# Altium PCB final_board.PcbDoc (part 1 of 2)
Units mm, origin at the board's own origin, x right, y up, seen from the top; angles counter-clockwise.
Board outline 39.12 x 41.3 mm, 2 copper layers (Top Layer, Bottom Layer); 55 components, 47 nets, 226 pads, 45 vias.
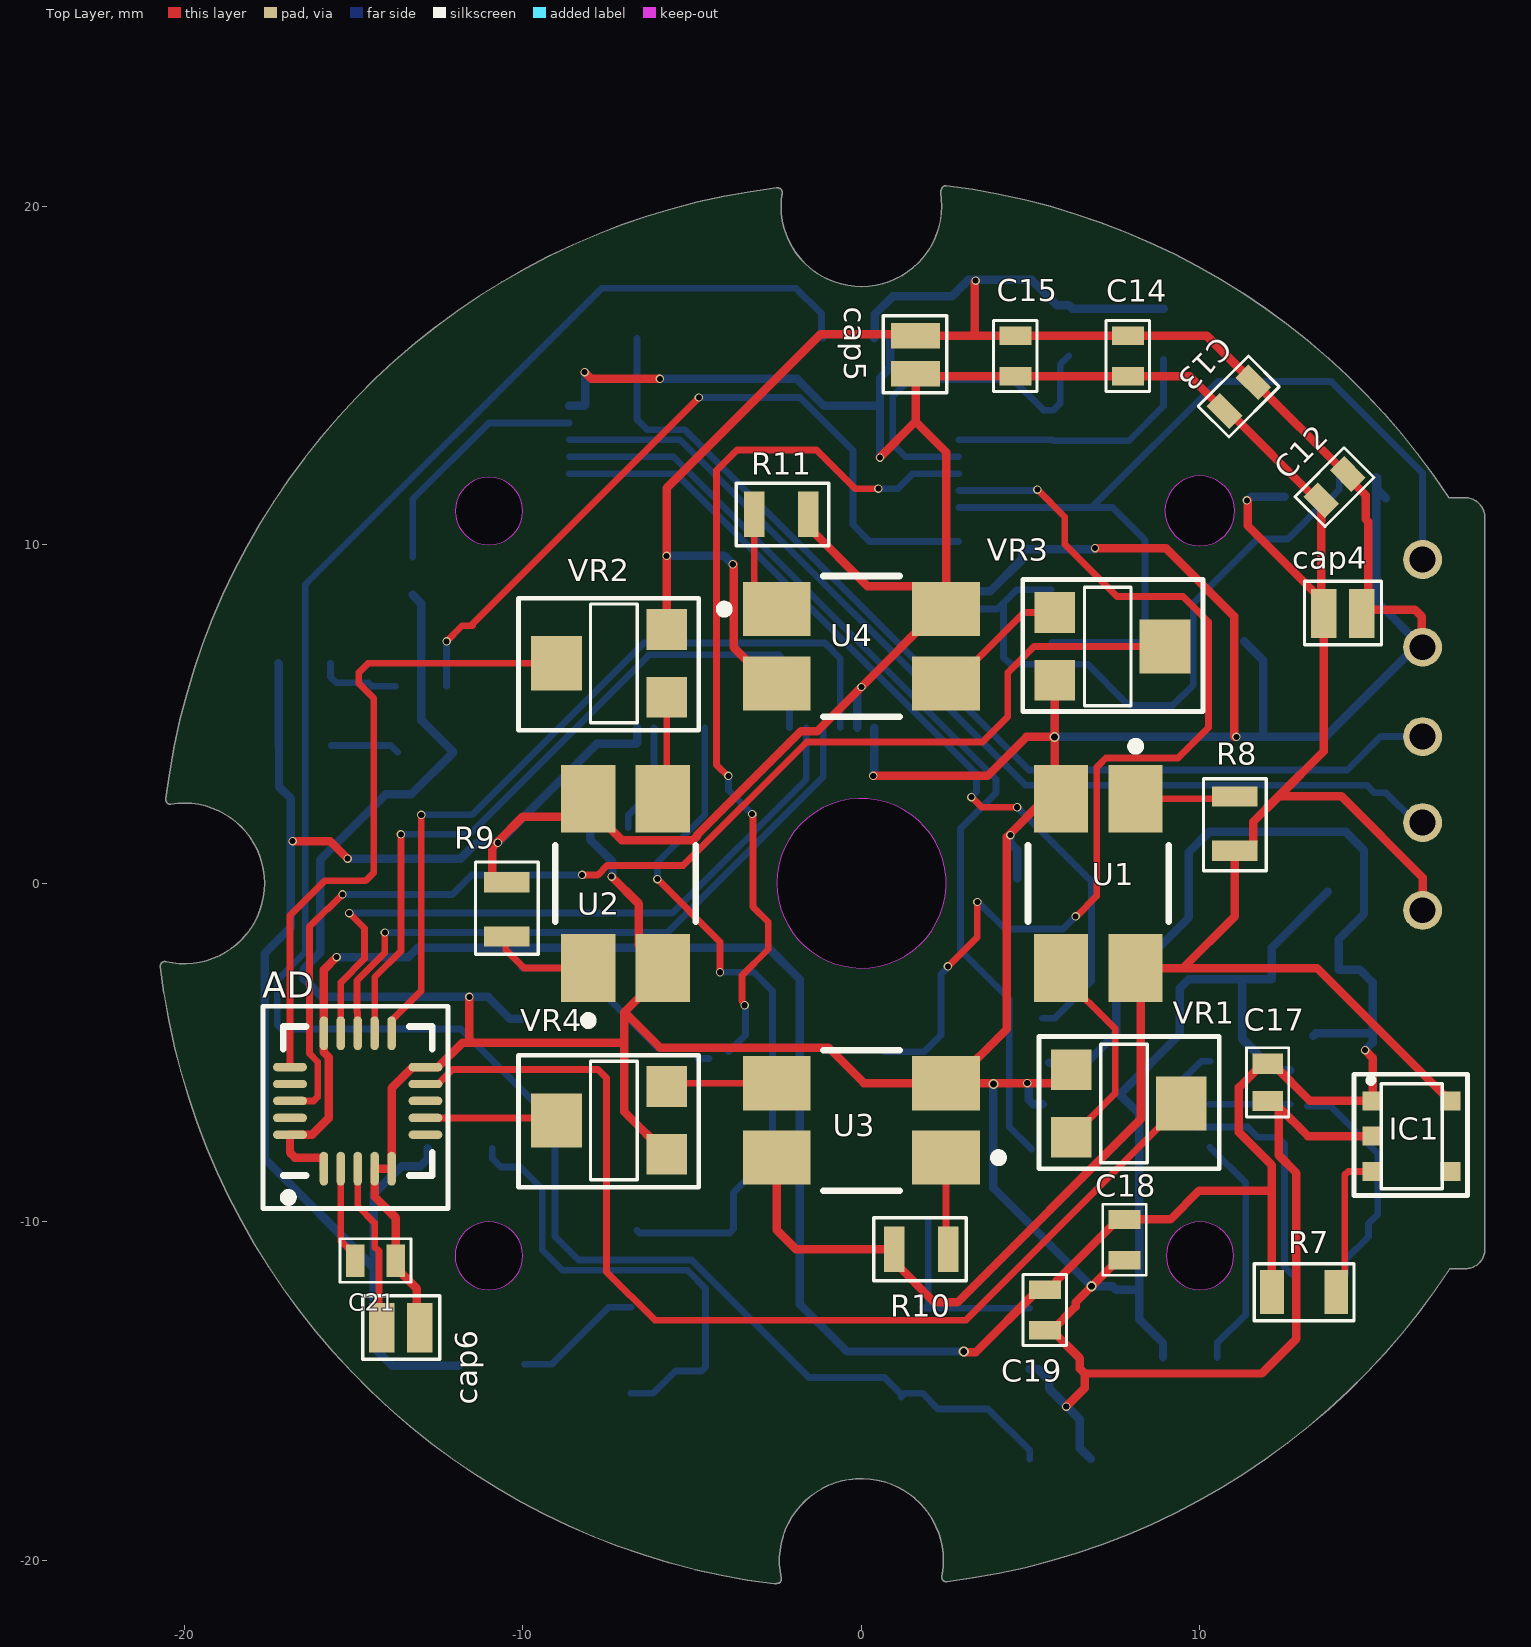
[diagram p0: Top Layer view]
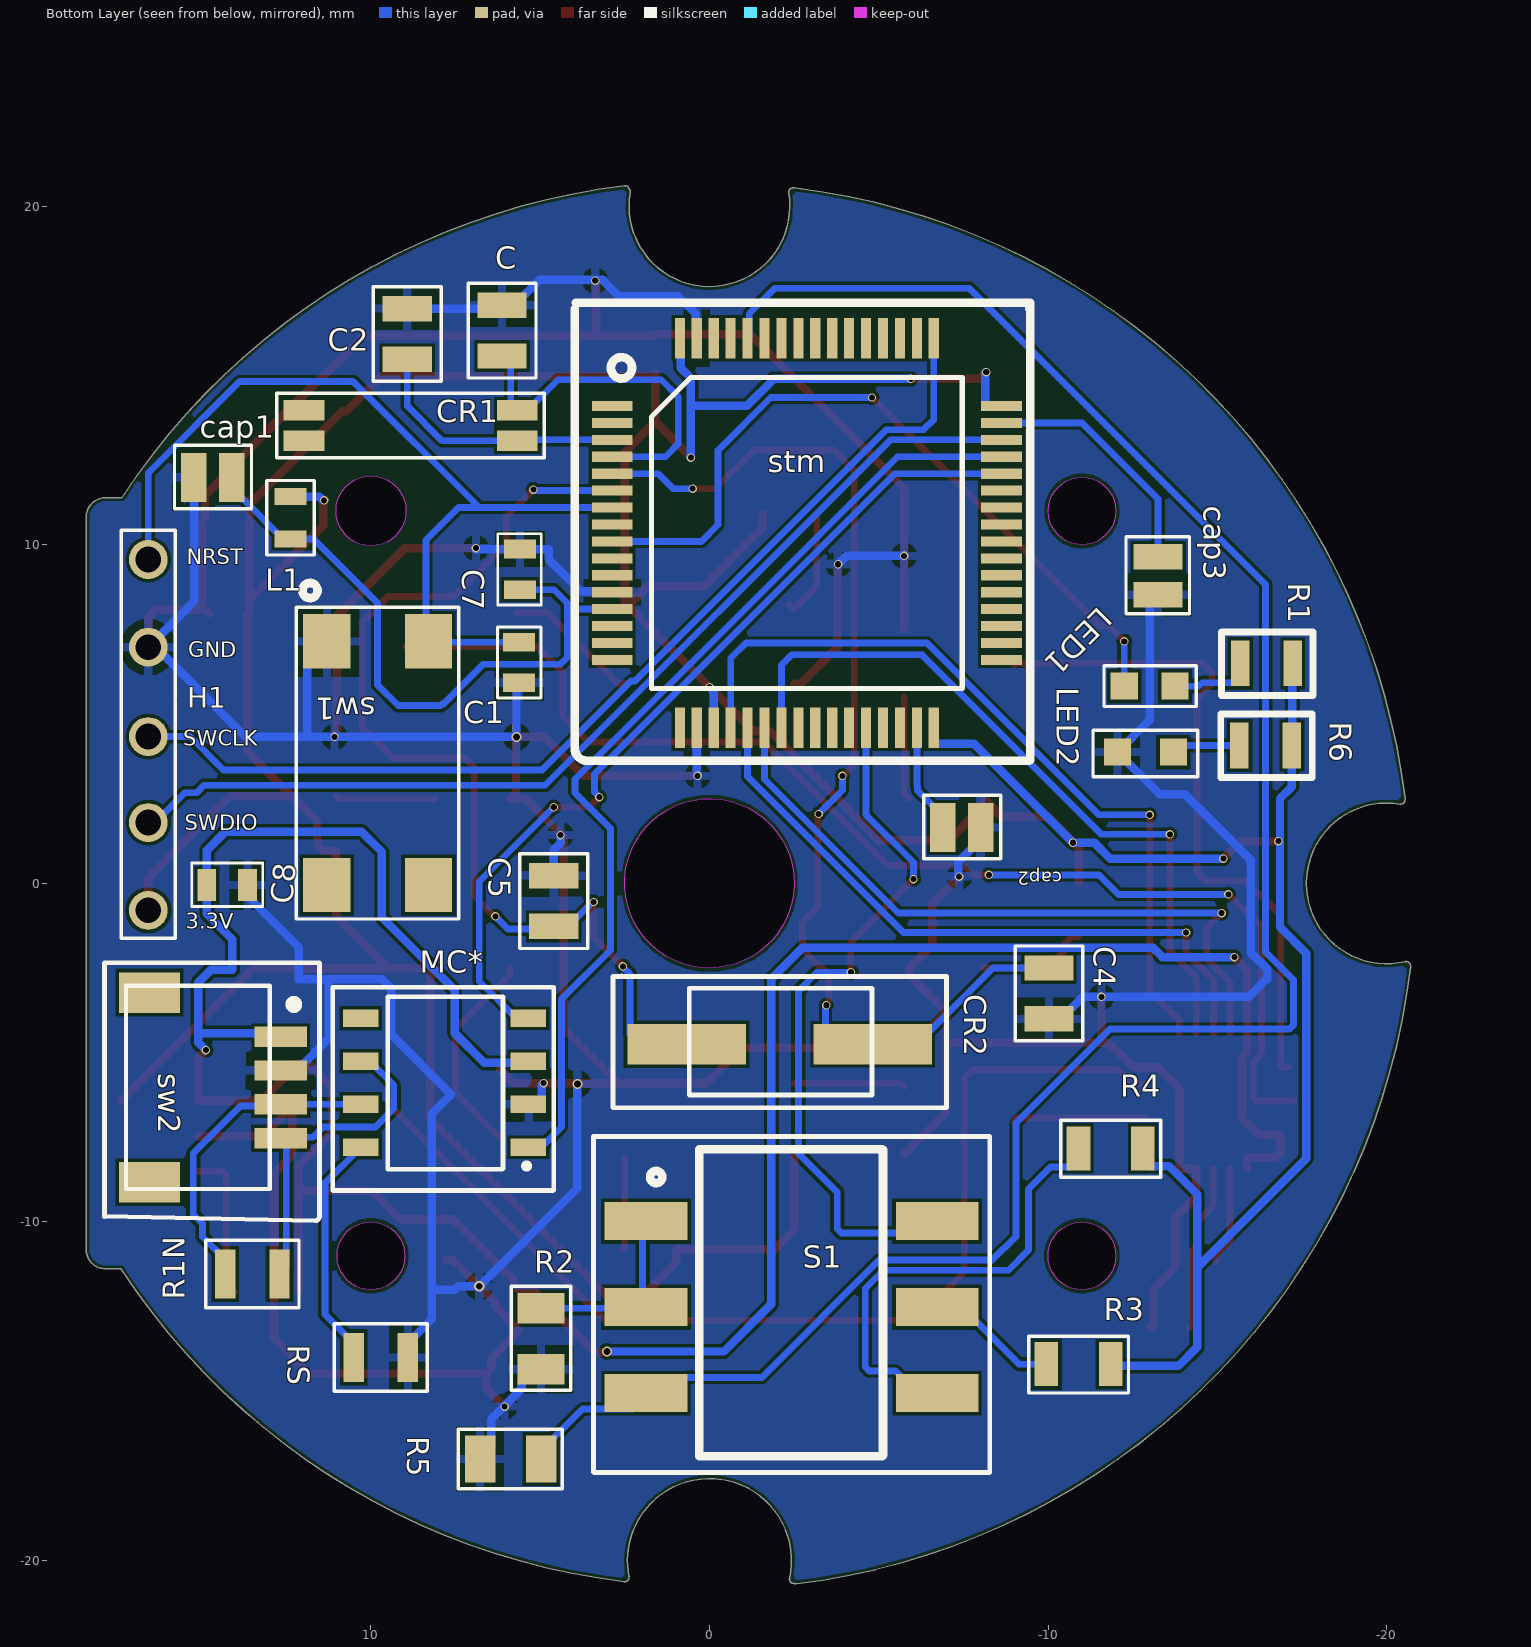
[diagram p1: Bottom Layer view, seen from below]
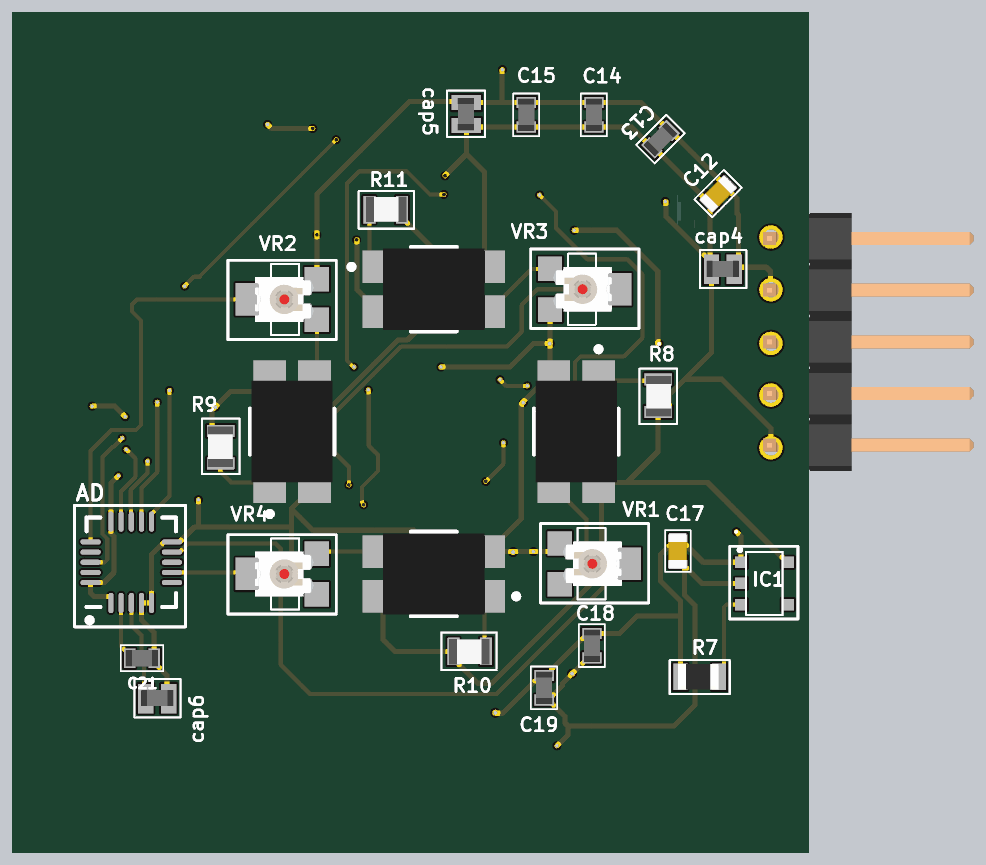
[diagram p2: 3D render of the assembled board from above, using the file's embedded part models]
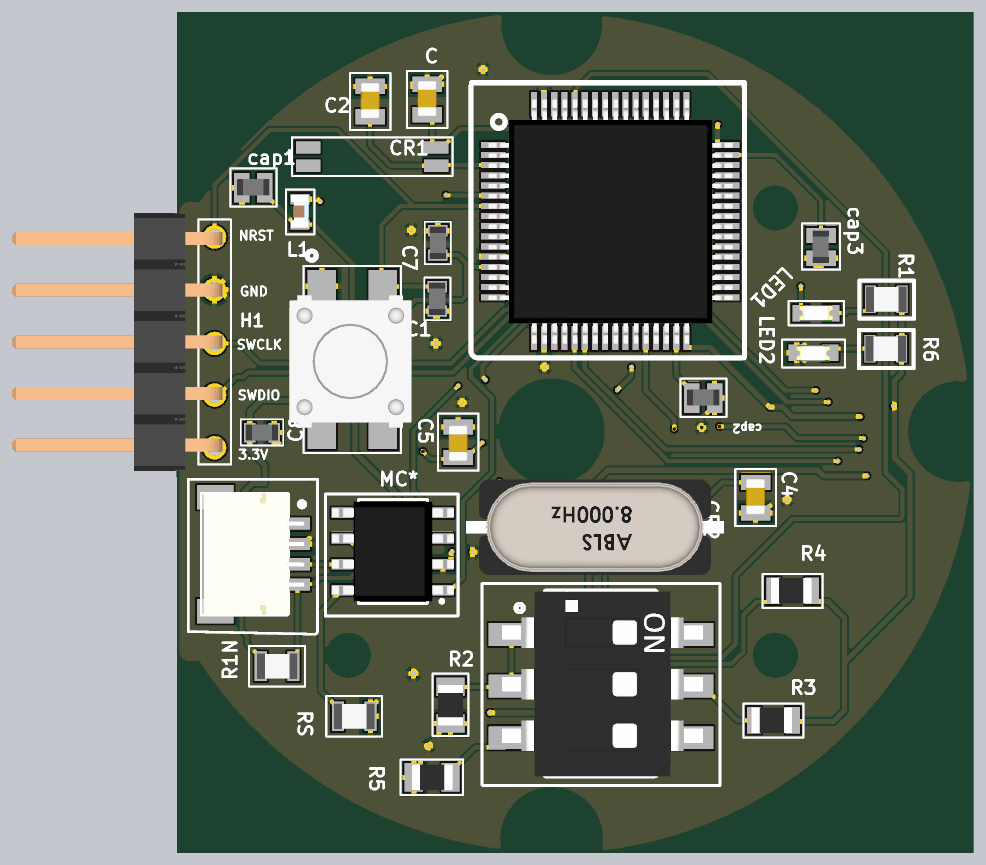
[diagram p3: 3D render of the assembled board from below, using the file's embedded part models]

## Layer stack, top to bottom
Top Solder: solder mask 0.0102, Solder Resist, Dk 3.5
Top Layer: signal copper 0.0356
Dielectric 1: dielectric 0.32, FR-4, Dk 4.8
Bottom Layer: signal copper 0.0356
Bottom Solder: solder mask 0.0102, Solder Resist, Dk 3.5

## Board outline
-20.705,-2.462 cw(c-20.578,-2.447) -20.701,-2.411 cw(c-20.575,-2.433) -20.546,-2.309 ccw(c-20,0) -17.627,0 ccw(c-20,0) -20.392,2.34 cw(c-20.413,2.466) -20.54,2.457 cw(c-20.417,2.49) -20.543,2.505 cw(c0,0) -2.509,20.543 cw(c-2.493,20.417) -2.459,20.539 cw(c-2.466,20.412) -2.338,20.412 cw(c-2.466,20.412) -2.34,20.391 ccw(c0,20) 2.373,20 ccw(c0,20) 2.339,20.397 cw(c2.465,20.418) 2.37,20.503 cw(c2.495,20.479) 2.51,20.606 cw(c0,0) 17.351,11.394 17.82,11.394 cw(c17.82,10.8) 18.414,10.8 18.414,-10.805 cw(c17.839,-10.805) 17.839,-11.38 17.383,-11.38 cw(c0,0) 2.52,-20.624 cw(c2.505,-20.497) 2.378,-20.506 cw(c2.503,-20.485) 2.378,-20.46 ccw(c0,-20) 2.422,-20 ccw(c0,-20) -2.365,-20.521 cw(c-2.49,-20.548) -2.362,-20.548 cw(c-2.49,-20.548) -2.5,-20.675 cw(c-2.562,-20.564) -2.578,-20.691 cw(c0,0)
cut-out: 9,-11 ccw(c10,-11) 10,-12 ccw(c10,-11) 11,-11 ccw(c10,-11) 10,-10 ccw(c10,-11)
cut-out: -2.5,0 ccw(c0.009,0.009) -0.026,-2.5 ccw(c0.003,0.003)
cut-out: -11.997,10.997 ccw(c-11,10.997) -11,10 ccw(c-11,10.997) -10.003,10.997 ccw(c-11,10.997) -11,11.994 ccw(c-11,10.997)
cut-out: 8.965,11 ccw(c9.997,11) 9.997,9.968 ccw(c9.997,11) 11.03,11 ccw(c9.997,11) 9.997,12.032 ccw(c9.997,11)
cut-out: -12,-11 ccw(c-11,-11) -11,-12 ccw(c-11,-11) -10,-11 ccw(c-11,-11) -11,-10 ccw(c-11,-11)

## Design rules (kind name [scope] priority, off if disabled: settings)
BoardOutlineClearance [All] p1: gap=0.1 ignorepadtopadclearanceinfootprint=FALSE
Clearance [All] p1: gap=0.1 ignorepadtopadclearanceinfootprint=FALSE except(0: Arc-Hole Track-Hole SMDPad-Hole THPad-Hole Via-Hole Fill-Hole Poly-Hole Region-Hole Text-Hole)
MinimumSolderMaskSliver [All] p1: minsoldermaskwidth=0.04
PolygonConnect [All] p1: connectstyle=Relief reliefconductorwidth=0.254 reliefentries=4 polygonreliefangle="90 Angle" airgapwidth=0.254
RoutingVias [All] p1: holewidth=0.711 width=1.27 viastyle="Through Hole" minholewidth=0.711 minwidth=1.27 maxholewidth=0.711 maxwidth=1.27
SilkToSolderMaskClearance [IsPad] p1: minsilkscreentomaskgap=0.15 clearancetoexposedcopper=TRUE
SolderMaskExpansion [All] p1: expansion=0.102
Width "Schematic Width Constraint_2" [InNet('3.3V')] p1: maxlimit=0.4 minlimit=0.2 preferedwidth=0.25
Width "Schematic Width Constraint_1" [InNet('GND')] p2: maxlimit=0.4 minlimit=0.25 preferedwidth=0.25
Width "Schematic Width Constraint" [InNet('5V')] p3: maxlimit=0.4 minlimit=0.2 preferedwidth=0.25
Width "W idth" [All] p4: maxlimit=0.2 minlimit=0.2 preferedwidth=0.2
28 further rules are at their usual default settings.

## Components (designator, comment, footprint, x,y, rotation, side; value= is the part's Value field where it differs from the comment)
AD "AD7682BCPZRL7" CP-20-4_M -14.875,-6.425 r90 top
C "22pf" Cap-22uf 6.125,16.325 r90 bottom
C1 "0.1uf" cap_100nf 5.625,6.525 r90 bottom
C2 "22pf" Cap-22uf 8.925,16.225 r90 bottom
C4 "22pf" Cap-22uf -10.025,-3.25 r90 bottom
C5 "22pf" Cap-22uf 4.6,-0.521 r270 bottom
C7 "0.1uf" cap_100nf 5.6,9.275 r270 bottom
C8 "0.1uf" cap_100nf 14.244,-0.05 r0 bottom
C12 "1uf" Cap-1uf 13.975,11.702 r225 top
C13 "0.1uf" cap_100nf 11.15,14.375 r225 top
C14 "0.1uf" cap_100nf 7.875,15.575 r270 top
C15 "0.1uf" cap_100nf 4.55,15.575 r270 top
C17 "1uf" Cap-1uf 12,-5.875 r90 top
C18 "0.1uf" cap_100nf 7.775,-10.525 r270 top
C19 "0.1uf" cap_100nf 5.425,-12.6 r270 top
C21 "0.1uf" cap_100nf -14.35,-11.146 r180 top
cap1 "10uf" Cap-10 14.675,11.989 r0 bottom
cap2 "10uf" Cap-10 -7.45,1.65 r0 bottom
cap3 "10uf" Cap-10 -13.25,9.083 r270 bottom
cap4 "10uf" Cap-10 14.213,7.975 r180 top
cap5 "10uf" Cap-10 1.6,15.613 r270 top
cap6 "10uf" Cap-10 -13.6,-13.125 r180 top
CR1 "SSPT7F-7PF20-R" crytal 5.675,13.071 r0 bottom
CR2 "12Mhz" crystal-12mhz 0.675,-4.75 r180 bottom
H1 "61300511021" connector 16.575,4.385 r0 bottom
IC1 "RT9013-12GB" FT9013 15.1,-7.465 r0 top
L1 "4.7uH" inductor 12.371,10.8 r270 bottom
LED1 "geen" LED-Green -13,5.825 r0 bottom
LED2 "RED" LED-RED -12.875,3.875 r0 bottom
MC* "MCP2551T-I/SN" mcp2551 5.35,-7.795 r0 bottom
R1 "510" Resistor-510 -16.45,6.5 r0 bottom
R1N "120" res-1k 13.5,-11.536 r0 bottom
R2 "10k" Resistor-10k 4.975,-13.45 r90 bottom
R3 "4.7k" Resistor-smd-4.7k -10.9,-14.2 r180 bottom
R4 "4.7k" Resistor-smd-4.7k -11.85,-7.825 r180 bottom
R5 "10k" Resistor-10k 5.875,-17 r0 bottom
R6 "510" Resistor-510 -16.425,4.075 r0 bottom
R7 "4.7k" Resistor-smd-4.7k 13.075,-12.063 r0 top
R8 "390 Ohms" Resistor-390 11.03,1.768 r90 top
R9 "390 Ohms" Resistor-390 -10.471,-0.767 r270 top
R10 "390 Ohms" Resistor-390 1.768,-10.805 r0 top
R11 "390 Ohms" Resistor-390 -2.367,10.898 r180 top
RS "1k" res-1k 9.708,-14 r180 bottom
S1 "219-3LPSTR" DIP6 1.875,-9.973 r180 bottom
stm "STM32F405RGT7" Quad64 2.875,14.1 r180 bottom
sw1 "TL3305AF160QG" switch 8.3,7.15 r270 bottom
sw2 "SM04B-SRSS-TB(LF)(SN)" JST_SM04B-SRSS-TB(LF)(SN) 12.662,-6.025 r270 bottom
U1 "EE-SX1108" Omron_EE-SX1108_0 7,0 r270 top
U2 "EE-SX1108" Omron_EE-SX1108_0 -6.967,0 r90 top
U3 "EE-SX1108" Omron_EE-SX1108_0 0,-7 r180 top
U4 "EE-SX1108" Omron_EE-SX1108_0 0,7 r0 top
VR1 "10k" variable-resistor 9.444,-6.5 r270 top
VR2 "10k" variable-resistor -9,6.5 r90 top
VR3 "10k" variable-resistor 8.965,7 r270 top
VR4 "10k" variable-resistor -9,-7 r90 top

## Footprints (in the part's own frame and the unit in brackets; to place one, negate y for a bottom-side part, rotate by r counter-clockwise, add the part's x,y. Pads: shape width x height; smd on the part's side, far side on the other; paste and mask are expansions set on the pad)
Cap-1uf [mm]
  rect 0.6x0.9 smd: 1(-0.55,0) 2(0.55,0)
  silkscreen extent -1.02,-0.63 1.02,0.63, body extent -0.88,-0.47 0.88,0.48, height 0.96
Cap-10 [mm]
  rect 0.75x1.45 smd: 1(-0.562,0) 2(0.563,0)
  silkscreen extent -1.15,-0.95 1.12,0.92, body extent -0.8,-0.43 0.8,0.37, height 0.46
Cap-22uf [mm]
  rect 0.75x1.45 smd: 1(-0.75,0) 2(0.75,0)
  silkscreen extent -1.4,-1 1.4,1, body extent -0.84,-0.48 0.93,0.47, height 0.95
cap_100nf [mm]
  rect 0.55x0.95 smd: 1(-0.6,0) 2(0.6,0)
  silkscreen extent -1.05,-0.65 1.05,0.64, body extent -0.8,-0.4 0.8,0.4, height 0.46
connector [mm]
  round 1.15 hole 0.762: 1(0,5.18) 2(0,2.59) 3(0,0.05) 4(0,-2.59) 5(0,-5.18)
  silkscreen extent -0.8,-6.05 0.8,6, body extent -0.39,-6.38 9.97,6.32, height 2.55
CP-20-4_M [mm] "QFN, 20-Leads, Body 4x4mm, Pitch 0.5mm, Thermal Pad 2.5x2.5mm, IPC Low Density"
  oval 1x0.25 smd: 1(-2,1) 2(-2,0.5) 3(-2,0) 4(-2,-0.5) 5(-2,-1) 11(2,-1) 12(2,-0.5) 13(2,0) 14(2,0.5) 15(2,1)
  oval 0.25x1 smd: 6(-1,-2) 7(-0.5,-2) 8(0,-2) 9(0.5,-2) 10(1,-2) 16(1,2) 17(0.5,2) 18(0,2) 19(-0.5,2) 20(-1,2)
  silkscreen extent -3.17,-2.67 2.79,2.79, body extent -2.05,-2.05 2.05,2.05, height 1
crystal-12mhz [mm]
  rect 3.5x1.2 smd: 1(0,0) 2(5.5,0)
  silkscreen extent -2.17,-1.88 7.68,2.02, body extent -3.55,-2.3 9.15,2.4, height 4.22
crytal [mm] "Crystal 0.032768MHz 7pF 4-Pin SMD T/R"
  rect 1.2x0.6 smd: 1(0,0) 2(6.3,0) 3(6.3,-0.9) 4(0,-0.9)
  silkscreen extent -0.8,-1.4 7.1,0.5, body extent -0.75,-1.35 7.15,0.55, height 1.4
DIP6 [mm]
  rect 2.44x1.13 smd: 1(0,0) 2(0,-2.54) 3(0,-5.08) 4(8.6,-5.08) 5(8.6,-2.54) 6(8.6,0)
  silkscreen extent -1.55,-7.42 10.15,2.5, body extent -0.57,-6.99 9.33,2.1, height 4.06
FT9013 [mm] "IC"
  rect 0.597x0.559 smd: 1(0,1.04) 2(0,0) 3(0,-1.041) 4(2.3,-1.041) 5(2.3,1.04)
  silkscreen extent -0.55,-1.75 2.8,1.83, body extent 0.25,-1.55 10.43,1.5, height 1.56
inductor [mm]
  rect 0.5x0.95 smd: 1(-0.625,0) 2(0.625,0)
  silkscreen extent -1.1,-0.7 1.1,0.7, body extent -0.83,-0.44 0.79,0.42, height 0.37
JST_SM04B-SRSS-TB(LF)(SN) [mm]
  rect 0.6x1.55 smd: 1(-1.5,0) 2(-0.5,0) 3(0.5,0) 4(1.5,0)
  rect 1.2x1.8 smd: S1(-2.8,-3.875) S2(2.8,-3.875)
  silkscreen extent -3.68,-5.21 3.94,1.14, body extent -3,-4.44 3,0.51, height 2.91
LED-Green [mm]
  rect 0.8x0.8 smd: 1(-0.75,0) 2(0.75,0)
  silkscreen extent -1.38,-0.6 1.35,0.6, body extent -0.81,-0.4 0.81,0.4, height 0.6
LED-RED [mm]
  rect 0.8x0.8 smd: 1(-0.825,0) 2(0.825,0)
  silkscreen extent -1.55,-0.65 1.55,0.73, body extent -0.79,-0.38 0.83,0.42, height 0.6
mcp2551 [mm]
  rect 1.05x0.51 smd: 1(0,0) 2(0,-1.27) 3(0,-2.54) 4(0,-3.81) 5(4.95,-3.81) 6(4.95,-2.54) 7(4.95,-1.27) 8(4.95,0)
  silkscreen extent -0.75,-4.72 5.77,1.28, body extent -0.55,-4.35 5.45,0.55, height 1.41
Omron_EE-SX1108_0 [mm]
  rect 2x1.6 smd paste+0 mask+0: A(-2.5,1.1) C(2.5,1.1) E(2.5,-1.1) K(-2.5,-1.1)
  silkscreen extent -4.17,-2.07 1.12,2.07, body extent -3.6,-2.17 3.6,2.17, height 0.25
Quad64 [mm]
  rect 1.2x0.3 smd: 1(0,0) 2(0,-0.5) 3(0,-1) 4(0,-1.5) 5(0,-2) 6(0,-2.5) 7(0,-3) 8(0,-3.5) 9(0,-4) 10(0,-4.5) 11(0,-5) 12(0,-5.5) 13(0,-6) 14(0,-6.5) 15(0,-7) 16(0,-7.5) 33(11.5,-7.5) 34(11.5,-7) 35(11.5,-6.5) 36(11.5,-6) 37(11.5,-5.5) 38(11.5,-5) 39(11.5,-4.5) 40(11.5,-4) 41(11.5,-3.5) 42(11.5,-3) 43(11.5,-2.5) 44(11.5,-2) 45(11.5,-1.5) 46(11.5,-1) 47(11.5,-0.5) 48(11.5,0)
  rect 0.3x1.2 smd: 17(2,-9.5) 18(2.5,-9.5) 19(3,-9.5) 20(3.5,-9.5) 21(4,-9.5) 22(4.5,-9.5) 23(5,-9.5) 24(5.5,-9.5) 25(6,-9.5) 26(6.5,-9.5) 27(7,-9.5) 28(7.5,-9.5) 29(8,-9.5) 30(8.5,-9.5) 31(9,-9.5) 32(9.5,-9.5) 49(9.5,2) 50(9,2) 51(8.5,2) 52(8,2) 53(7.5,2) 54(7,2) 55(6.5,2) 56(6,2) 57(5.5,2) 58(5,2) 59(4.5,2) 60(4,2) 61(3.5,2) 62(3,2) 63(2.5,2) 64(2,2)
  silkscreen extent -1.1,-10.48 12.35,3.05, body extent -0.23,-9.77 11.77,2.23, height 1.41
res-1k [mm]
  rect 0.6x1.45 smd: 1(-0.8,0) 2(0.8,0)
  silkscreen extent -1.37,-1 1.38,1, body extent -1,-0.63 1,0.63, height 0.44
Resistor-10k [mm]
  rect 0.9x1.4 smd: 1(-0.9,0) 2(0.9,0)
  silkscreen extent -1.53,-0.87 1.55,0.87, body extent -1,-0.62 1,0.63, height 0.56
Resistor-390 [mm]
  rect 0.6x1.35 smd: 1(-0.8,0) 2(0.8,0)
  silkscreen extent -1.4,-0.92 1.33,0.92, body extent -1.03,-0.66 0.97,0.6, height 0.44
Resistor-510 [mm]
  rect 0.55x1.35 smd: 1(-0.775,0) 2(0.775,0)
  silkscreen extent -1.38,-0.92 1.33,0.95, body extent -1,-0.63 1,0.63, height 0.44
Resistor-smd-4.7k [mm]
  rect 0.7x1.3 smd: 1(-0.95,0) 2(0.95,0)
  silkscreen extent -1.48,-0.85 1.48,0.82, body extent -1.08,-0.62 0.92,0.63, height 0.56
switch [mm] "switch_pad"
  rect 1.6x1.4 smd: 1(0,-3) 2(7.2,-3) 3(0,0) 4(7.2,0)
  silkscreen extent -1.72,-3.9 8.2,0.9, body extent 0.45,-4.6 6.95,1.4, height 4.31
variable-resistor [mm]
  rect 1.2x1.2 smd: 1(-1,-3.25) 3(1,-3.25)
  rect 1.6x1.5 smd: 2(0,0)
  silkscreen extent -1.97,-4.2 1.92,1.12, body extent -1.1,-3.1 1.1,-0.2, height 1.11

## Part data
AD: "IC ADC 16BIT 4CH 250KSPS 20LFCSP", Case/Package=QFN, Manufacturer="Analog Devices / Linear Technology", Max Operating Temperature=85°C, Max Power Dissipation=19.2mW, Max Supply Voltage=5.5V, Min Operating Temperature=-40°C, Min Supply Voltage=2.3V, Package Quantity=1, Power Consumption=15.5mW, Supplier Part Number 1=584-AD7682BCPZR7, ComponentLink1Description=digikey, ComponentLink1URL=https://www.digikey.com/en/products/detail/analog-devices-inc/AD7682BCPZRL7/1880105?s=N4IgTCBcDaIIIBEDsA2AHGAQgYQAoC0AlAGSRAF0BfIA, ComponentLink2Description=datasheet, ComponentLink2URL=https://www.analog.com/media/en/technical-documentation/data-sheets/AD7682_7689.pdf, Contact Plating=Tin,Matte, Differential Nonlinearity=-1LSB, Full Scale Error=30LSB, Integral Nonlinearity (INL)=1.5LSB, Interface=SPI,Serial,4-WIRE, Manufacturer Part Number=AD7682BCPZRL7, Mount="Surface Mount", Number of A/D Converters=1, Number of Bits=16, Number of Channels=4, Number of Converters=1, Number of Elements=1, Number of Inputs=4, Number of Pins=20, Packaging="Tape and Reel", Parameters="Integerated Circuits", Polarity=Bipolar,Unipolar, Power Dissipation=19.2mW, Pricing 1="1 = 13.00000, 10 = 11.94000, 50 = 11.14000, 100 = 9.59000, 1000 = 8.24000, 10000 = 8.23000 (USD)", Resolution=16b, RoHS=Yes, RoHS Compliant=Yes, Sampling Rate=250KS/s, Series=PulSAR®, Signal to Noise Ratio (SNR)=93.5dB, Stock 1=3753, Supplier 1=Mouser, Supply Type=Single
C C2 C4 C5: library part C0805C220J8GAC7800, "CAP CER 22PF 10V C0G/NP0 0805", Capacitance=22pF, Case/Package=0805, Case Code (Metric)=2012, Manufacturer=KEMET, Max Operating Temperature=125°C, Min Operating Temperature=-55°C, Supplier Part Number 1=399-15026-1-ND, Tolerance=5%, Voltage Rating=10V, Case Code (Imperial)=0805, ComponentLink1Description=datasheet, ComponentLink1URL=https://api.kemet.com/component-edge/download/datasheet/C0805C220J8GAC7800.pdf?src-supplier=Digi-Key, ComponentLink2Description=digikey, ComponentLink2URL=https://www.digikey.com/en/products/detail/kemet/C0805C220J8GAC7800/7382141?s=N4IgTCBcDaIMIAYAcCCscxgQKSQcQEE4B2FBEAXQF8g, Manufacturer Part Number=C0805C220J8GAC7800, Mount="Surface Mount", Packaging="Tape and Reel", Pricing 1="1 = 0.25000, 10 = 0.17200, 50 = 0.11500, 100 = 0.09780, 500 = 0.06900, 1000 = 0.06038 (USD)", RoHS=No, Stock 1=7404, Supplier 1=Digi-Key
C1 C7 C8 C13 C14 C15 C18 C19 C21: library part VJ0603Y104KXJCW1BC, "0603 0.1 uF 16 V ±10% Tolerance X7R SMT Multilayer Ceramic Chip Capacitor", Capacitance=100nF, Case/Package=0603, Case Code (Metric)=1608, Dielectric=X7R, Dielectric Material=Tantalum, Manufacturer=Vishay, Max Operating Temperature=125°C, Min Operating Temperature=-55°C, Package Quantity=4000, Supplier Part Number 1=3298108, Tolerance=10%, Voltage Rating=16V, Case Code (Imperial)=0603, Category=capacitors, ComponentLink2Description=datasheet, ComponentLink2URL=https://datasheet.ciiva.com/17445/vjw1bcbascomseries-17445038.pdf?src-supplier=Avnet+Europe, ComponentLink3Description=digikey, ComponentLink3URL=https://www.digikey.com/en/products/detail/vishay-vitramon/VJ0603Y104KXJCW1BC/420869?s=N4IgTCBcDaIGoCkAMA2JBmAmgRiQFgGkANBAYQHVsAhUkAXQF8g, Construction=Flat, Depth=0.8mm, Height=0.95mm, Lead Free="Lead Free", Length=1.6mm, Manufacturer Part Number=VJ0603Y104KXJCW1BC, Mount="Surface Mount", Number of Pins=2, Packaging="Tape and Reel", Pricing 1="4000 = 0.10000, 20000 = 0.07000 (EUR)", Radiation Hardening=No, RoHS=Yes, RoHS Compliant=Yes, Series=VJ, Stock 1=32000, Supplier 1=Farnell, Termination=SMD/SMT, Thickness=0.035inch, Voltage Rating (DC)=16V, Width=0.031inch
C12 C17: library part TMK107B7105KA-T, "TAIYO YUDEN - TMK107B7105KA-T - SMD Multilayer Ceramic Capacitor, 1 µF, 25 V, 0603 [1608 Metric], ± 10%, X7R, M Series", Capacitance=1uF, Case/Package=0603, Case Code (Metric)=1608, Dielectric=X7R, Manufacturer="Taiyo Yuden", Max Operating Temperature=125°C, Min Operating Temperature=-55°C, Package Quantity=1, Resistor Type=Ceramic, Supplier Part Number 1=2779198, Tolerance=10%, Voltage Rating=25V, Case Code (Imperial)=0603, Category=Capacitors, ComponentLink4Description=datasheet, ComponentLink4URL=https://datasheet.ciiva.com/30163/854tmk107b7105ka-t-30163691.pdf?src-supplier=Onlinecomponents.com, ComponentLink5Description=digikey, ComponentLink5URL=https://www.digikey.com/en/products/detail/taiyo-yuden/TMK107B7105KA-T/2714162?s=N4IgTCBcDaICoFkDSBGADAdgEIfQViQEEBaOEAXQF8g, Construction=Flat, Contact Plating=Tin, Depth=0.8mm, Halogen Free="Halogen Free", Height=0.8mm, Length=1.6mm, Manufacturer Part Number=TMK107B7105KA-T, Mount="Surface Mount", Number of Pins=2, Packaging="Tape and Reel", Pricing 1="4000 = 0.06000, 8000 = 0.05000 (EUR)", Radiation Hardening=No, REACH SVHC="No SVHC", RoHS=Yes, RoHS Compliant=Yes, Series=M, Stock 1=76000, Supplier 1=Farnell, Termination=SMD/SMT, Thickness=0.035inch, Voltage Rating (DC)=25V, Width=0.031inch
cap1 cap2 cap3 cap4 cap5 cap6: library part C0805C106M8RACTU, "CAP 10UF 10V X7R 20% SMD 0805", Capacitance=10uF, Case/Package=0805, Case Code (Metric)=2012, Dielectric=X7R, Dielectric Material=Ceramic, Manufacturer=KEMET, Max Operating Temperature=125°C, Min Operating Temperature=-55°C, Package Quantity=1, Supplier Part Number 1=2855121, Tolerance=20%, Voltage Rating=10V, Case Code (Imperial)=0805, Category=Capacitors, ComponentLink1Description=datasheet, ComponentLink1URL=https://datasheet.ciiva.com/5408/kem-c1002-x7r-smd-5408794.pdf?src-supplier=Mouser, ComponentLink2Description=digikey, ComponentLink2URL=https://www.digikey.com/en/products/detail/kemet/C0805C106M8RACTU/3317619, Length=0.079inch, Manufacturer Part Number=C0805C106M8RACTU, Mount="Surface Mount", Packaging="Tape and Reel", Pricing 1="2500 = 0.70000, 5000 = 0.68000, 10000 = 0.66000, 15000 = 0.66000, 25000 = 0.65000 (EUR)", REACH SVHC="No SVHC", RoHS=Yes, RoHS Compliant=Yes, Series=C, Stock 1=7500, Supplier 1=Farnell, Termination=SMD/SMT, Thickness=0.055inch, Voltage Rating (DC)=10V, Width=0.049inch
CR1: "Crystal 0.032768MHz 7pF 4-Pin SMD T/R", Case/Package=SMD/SMT, ESR (Equivalent Series Resistance)=65kR, Frequency=32.768kHz, Frequency Tolerance=20ppm, Load Capacitance=7pF, Manufacturer=Seiko, Max Operating Temperature=85°C, Min Operating Temperature=-40°C, Package Quantity=3000, Supplier Part Number 1=628-SSPT7F-7PF20PPM, Category=Crystals, ComponentLink2Description=datasheet, ComponentLink2URL=https://www.sii.co.jp/en/quartz/files/2014/02/SSP-T7-F_Leaflet_e20151217.pdf?src-supplier=Digi-Key, ComponentLink3Description=digikey, ComponentLink3URL=https://www.digikey.com/en/products/detail/seiko-instruments/SSPT7F-7PF20-R/2665321?s=N4IgTCBcDaIMpwAoBUDsAxAtKx6wAZMAlEAXQF8g, Height=0.055inch, Length=0.264inch, Manufacturer Part Number=SSPT7F-7PF20-R, Mount="Surface Mount", Packaging="Tape and Reel", Pricing 1="1 = 0.60000, 10 = 0.45000, 50 = 0.45000, 100 = 0.40000, 1000 = 0.32000, 10000 = 0.28000 (USD)", RoHS=Yes, Stock 1=4421, Supplier 1=Mouser, Termination=SMD/SMT, Tolerance=20ppm, Width=0.059inch
CR2: library part ABLS7M-12.000MHZ-B-2-T, "Crystal 12MHz ±20ppm (Tol) ±50ppm (Stability) 18pF FUND 60Ohm 2-Pin HC-49/US SMD T/R", Case/Package=SMD/SMT, ESR (Equivalent Series Resistance)=60R, Frequency=12MHz, Frequency Stability=50ppm, Frequency Tolerance=20ppm, Load Capacitance=18pF, Manufacturer=Abracon, Max Operating Temperature=70°C, Min Operating Temperature=-20°C, Package Quantity=3000, Supplier Part Number 1=815-ABLS7M-12-B-2-T, Category=crystals, ComponentLink3Description=datasheet, ComponentLink3URL=http://abracon.com/Resonators/ABLS7M.pdf?src-supplier=Digi-Key, ComponentLink4Description=digikey, ComponentLink4URL=https://www.digikey.com/en/products/detail/abracon-llc/ABLS7M-12-000MHZ-B-2-T/5138409?s=N4IgTCBcDaIIICEAyBlA7AWQLQEYwDoAGYjACQC0sEswsAVEAXQF8g, Height=0.091inch, Length=0.276inch, Manufacturer Part Number=ABLS7M-12.000MHZ-B-2-T, Mount="Surface Mount", Packaging="Tape and Reel", Pricing 1="1 = 0.35000, 10 = 0.28800, 50 = 0.26400, 100 = 0.23300, 1000 = 0.18800, 10000 = 0.17200 (USD)", RoHS=Yes, Stock 1=2202, Supplier 1=Mouser, Termination=SMD/SMT, Tolerance=20ppm, Width=0.161inch
H1: "WURTH ELEKTRONIK - 61300511021 - Board-To-Board Connector, 2.54 mm, 5 Contacts, Header, WR-PHD Series, Through Hole, 1 Rows", Color=Black, Manufacturer="Wurth Electronics", Supplier Part Number 1=2356179, ComponentLink4Description=datasheet, ComponentLink4URL=http://www.farnell.com/datasheets/1442172.pdf?src-supplier=Newark, ComponentLink5Description=digikey, ComponentLink5URL=https://www.digikey.com/en/products/detail/w%C3%BCrth-elektronik/61300511021/4846830, Connector Type="Male Pin", Contact Material=Copper, Contact Mating Length=0.236inch, Contact Plating=Gold, Gender=Male, Manufacturer Part Number=61300511021, Mount="Through Hole", Number of Contacts=5, Number of Positions=5, Number of Rows=1, Packaging=Bulk, Pitch=0.1inch, Pricing 1="10 = 1.47000, 100 = 0.92000, 500 = 0.87000, 1000 = 0.84000, 2500 = 0.83000, 5000 = 0.81000 (EUR)", REACH SVHC=Unknown, RoHS=Yes, RoHS Compliant=Yes, Stock 1=744, Supplier 1=Farnell, Termination=Solder
IC1: "RICHTEK   RT9013-12GB   IC, LDO, FIXED, 1.2V, 0.5A, SOT-23-5", Case/Package=SOT-23-5, Dropout Voltage=250mV, Manufacturer=Richtek, Max Input Voltage=5.5V, Max Operating Temperature=85°C, Min Current Limit=500mA, Min Input Voltage=2.2V, Min Operating Temperature=-40°C, Nominal Output Voltage=1.2V, Supplier Part Number 1=2363025, Category="integrated circuits", ComponentLink1Description=datasheet, ComponentLink1URL=https://datasheet.ciiva.com/22749/1720528-22749439.pdf?src-supplier=Element14, ComponentLink2Description=digikey, ComponentLink2URL=https://www.digikey.com/en/products/detail/richtek-usa-inc/RT9013-12GB/2546285?s=N4IgTCBcDaIEoBUCcAGAjAZgLRrAcQCEQBdAXyA, Lead Free="Lead Free", Manufacturer Part Number=RT9013-12GB, Mount="Surface Mount", Number of Pins=5, Number of Regulators=1, Output Current=500mA, Output Voltage=1.2V, Packaging="Tape and Reel", Pricing 1="1 = 1.73000, 10 = 1.62000, 100 = 1.35000, 500 = 1.22000, 1000 = 1.10000, 2500 = 1.02000, 5000 = 0.93000 (EUR)", REACH SVHC=Unknown, RoHS=Yes, Stock 1=576, Supplier 1=Farnell
L1: library part AIML-0603-4R7K-T, "Fixed Inductors 4700nH, 15mA Tol.=+/-5%", Case/Package=0603, Case Code (Metric)=1608, Current Rating=15mA, DC Resistance (DCR)=2.1R, Manufacturer=Abracon, Max Operating Temperature=125°C, Min Operating Temperature=-55°C, Package Quantity=4000, Self Resonant Frequency=50MHz, Supplier Part Number 1=815-AIML-0603-4R7KT, Test Frequency=10MHz, Tolerance=10%, Case Code (Imperial)=0603, Category=Inductor, ComponentLink4Description=datasheet, ComponentLink4URL=https://datasheet.ciiva.com/1053/aiml-0603-1053318.pdf?src-supplier=Digi-Key, ComponentLink5Description=digikey, ComponentLink5URL=https://www.digikey.com/en/products/detail/abracon-llc/AIML-0603-4R7K-T/2662971?s=N4IgTCBcDaIIIEkCyAZAtABgGwYMxoBYAlAdgGk0AVEAXQF8g, Core Material=Ferrite, Height=0.8mm, Height - Seated (Max)=0.039inch, Inductance=4.7uH, Lead Free="Lead Free", Length=0.063inch, Manufacturer Part Number=AIML-0603-4R7K-T, Max DC Current=15mA, Mount="Surface Mount", Packaging="Tape and Reel", Pricing 1="1 = 0.10000, 10 = 0.10000, 50 = 0.07700, 100 = 0.05800, 1000 = 0.02700, 10000 = 0.02700 (USD)", Q Factor=35, RoHS=Yes, RoHS Compliant=Yes, Series=AIML-0603, Shielding=Shielded, Stock 1=6717, Supplier 1=Mouser, Termination=SMD/SMT, Width=0.031inch
LED1: library part "LT Q39G-Q1OO-25-1", "LED GREEN DIFFUSED 0603 SMD", Case/Package=0603, Case Code (Metric)=1608, Color=Green, Forward Current=15mA, Forward Voltage=2.85V, Lens Color=White, Manufacturer="Osram Opto", Max Operating Temperature=85°C, Min Operating Temperature=-40°C, Package Quantity=16000, Reverse Voltage=5V, Supplier Part Number 1=6973715P, Test Current=5mA, Case Code (Imperial)=0603, Category="LED Indication", ComponentLink6Description=datasheet, ComponentLink6URL=http://www.osram-os.com/Graphics/XPic9/00183683_0.pdf?src-supplier=Digi-Key, ComponentLink7Description=digikey, ComponentLink7URL=https://www.digikey.com/en/products/detail/osram-opto-semiconductors-inc/LT-Q39G-Q1OO-25-1/2793416?s=N4IgTCBcDaIDIBUAEBFAzATgOIFoUEYB5QnMAVh3xAF0BfIA, Depth=0.9mm, Dominant Wavelength=530nm, Length=1.6mm, Lens Size=0.8mm, Lens Style=Flat,Diffused,Colorless,Rectangular, Lens Transparency=Diffused, Luminous Flux=0.34lm, Luminous Intensity=175.5mcd, Manufacturer Part Number="LT Q39G-Q1OO-25-1", Mount="Surface Mount", Number of Elements=1, Number of LEDs=1, Number of Pins=2, Packaging="Tape and Reel", Pricing 1="10 = 36.32000, 100 = 22.27100 (RUB)", Radiation Hardening=No, RoHS=Yes, RoHS Compliant=Yes, Series="CHIPLED 0603", Stock 1=9820, Supplier 1=RSComponents, Viewing Angle=130°, Width=0.8mm
LED2: library part APT1608SRCPRV, "LED RED CLEAR CHIP SMD", Case/Package=0603, Case Code (Metric)=1608, Color=Red, Forward Current=20mA, Forward Voltage=1.85V, Lens Color=Clear, Manufacturer=Kingbright, Max Operating Temperature=85°C, Min Operating Temperature=-40°C, Package Quantity=2000, Supplier Part Number 1=604-APT1608SRCPRV, Case Code (Imperial)=0603, Category="LED indicator", ComponentLink2Description=datasheet, ComponentLink2URL=https://datasheet.ciiva.com/4688/apt1608srcprv-36891-4688981.pdf?src-supplier=Mouser, ComponentLink3Description=digikey, ComponentLink3URL=https://www.digikey.com/en/products/detail/kingbright/APT1608SRCPRV/1747520?s=N4IgTCBcDaIIIAUAqBGAbABgBwGUBKAwgngGogC6AvkA, Dominant Wavelength=640nm, Height=0.75mm, Illumination Color=Red, Lead Free="Lead Free", Length=1.6mm, Lens Style=Clear,Flat, Luminous Intensity=100mcd, Manufacturer Part Number=APT1608SRCPRV, Mount="Surface Mount", Number of LEDs=1, Number of Pins=2, Packaging="Tape and Reel", Pricing 1="1 = 0.20000, 10 = 0.12800, 50 = 0.12800, 100 = 0.06800, 1000 = 0.05400, 10000 = 0.03900 (USD)", RoHS=Yes, RoHS Compliant=Yes, Series=APT, Stock 1=1006, Supplier 1=Mouser, Test Current=20mA, Viewing Angle=120°, Wavelength=640nm, Width=0.8mm
MC*: "CAN Interface IC Hi Spd CAN Transceiv", Case/Package=SOIC, Manufacturer=Microchip, Max Operating Temperature=85°C, Max Supply Current=75mA, Max Supply Voltage=5.5V, Min Operating Temperature=-40°C, Min Supply Voltage=4.5V, Operating Supply Voltage=5V, Package Quantity=3300, Supplier Part Number 1=92C4188, Category="Integrated Circuits", ComponentLink6Description=datasheet, ComponentLink6URL=https://datasheet.ciiva.com/17649/jp011797-17649037.pdf?src-supplier=Avnet+Europe, ComponentLink7Description=digikey, ComponentLink7URL=https://www.digikey.com/en/products/detail/microchip-technology/MCP2551T-I-SN/509535?s=N4IgTCBcDaILIGEAKYCsqCMAVAtASQHoBlAORAF0BfIA, Data Rate=1Mbps, Height=1.5mm, Interface=CAN,Serial, Lead Free="Lead Free", Length=4.9mm, Logic Function=Transceiver, Manufacturer Part Number=MCP2551T-I/SN, Mount="Surface Mount", Nominal Supply Current=75mA, Number of Drivers=1, Number of Functions=1, Number of Pins=8, Number of Receive Buffers=1, Number of Receivers=1, Number of Transceivers=1, Number of Transmit Buffers=1, Packaging="Tape and Reel", Pricing 1="1 = 1.07000, 25 = 0.89600 (USD)", Radiation Hardening=No, REACH SVHC="No SVHC", RoHS=Yes, RoHS Compliant=Yes, Stock 1=6737, Supplier 1=Avnet, Supply Current=75mA, Supply Voltage-Nom=5.5V, Width=3.9mm
R1 R6: library part RC0805FR-07510RL, "Res Thick Film 0805 510 Ohm 1% 0.125W(1/8W) ±100ppm/C Epoxy Pad SMD T/R", Case/Package=0805, Case Code (Metric)=2012, Manufacturer=Yageo, Max Operating Temperature=155°C, Max Power Dissipation=125mW, Min Operating Temperature=-55°C, Resistance=510R, Resistor Type="Thick Film", Supplier Part Number 1=3496067, Temperature Coefficient=100ppm/°C, Tolerance=1%, Voltage Rating=150V, Case Code (Imperial)=0805, Category=Resistors, ComponentLink3Description=datasheet, ComponentLink3URL=https://datasheet.ciiva.com/17419/rc0805-17419942.pdf?src-supplier=Future+Electronics, ComponentLink4Description=digikey, ComponentLink4URL=https://www.digikey.com/en/products/detail/yageo/RC0805FR-07510RL/728016?s=N4IgTCBcDaIEoGEAMAOJBWAYnAtEg7OgIxJwAyIAugL5A, Construction=Rectangular, Depth=1.25mm, Features="Moisture Resistant", Height=0.5mm, Lead Free="Lead Free", Length=2mm, Manufacturer Part Number=RC0805FR-07510RL, Military Standard=Not, Mount="Surface Mount", Number of Terminations=2, Packaging="Tape and Reel", Power Rating=125mW, Pricing 1="10 = 0.13000, 100 = 0.12000, 500 = 0.08000, 1000 = 0.06000, 2500 = 0.05000, 5000 = 0.04000, 25000 = 0.03000 (EUR)", RoHS=Yes, RoHS Compliant=Yes, Series=RC, Size Code=0805, Stock 1=33870, Supplier 1=Farnell, Technology="THICK FILM", Termination=SMD/SMT, Voltage Rating (DC)=150V
R1N: library part Y1629120R000Q9R, "RES SMD 120 OHM 0.02% 1/10W 0805", Case/Package=0805, Case Code (Metric)=2012, Manufacturer="VPG Foil Resistors", Max Operating Temperature=150°C, Max Power Dissipation=100mW, Min Operating Temperature=-55°C, Package Quantity=100, Resistance=120R, Resistor Type="Metal Foil", Temperature Coefficient=0.2ppm/°C, Tolerance=0.02%, Case Code (Imperial)=0805, Category=resistor, ComponentLink4Description=datsheet, ComponentLink4URL=https://datasheet.ciiva.com/29718/vfcpseri-29718031.pdf?src-supplier=Digi-Key, ComponentLink5Description=digikey, ComponentLink5URL=https://www.digikey.com/en/products/detail/vishay-foil-resistors-division-of-vishay-precision-group/Y1629120R000Q9R/4231342?s=N4IgTCBcDaIJoEYBsYCcCwAYBKm8EVVsQBdAXyA, Features="Moisture Resistant,Anti-Sulfur", Height=0.025inch, Length=0.079inch, Manufacturer Part Number=Y1629120R000Q9R, Number of Terminations=2, Packaging="Tape and Reel", Pricing 1="1 = 13.84000, 25 = 7.40100, 50 = 5.40700, 100 = 3.54000, 250 = 3.36000 (USD)", RoHS=Yes, RoHS Compliant=Yes, Stock 1=0, Supplier 1="Arrow Electronics", Supplier Part Number 1=Y1629120R000Q9R, Width=0.049inch
R2 R5: library part MCU0805MD1002BP100, "MCU 0805-25 0.1% AT P1 10K", Case/Package=0805, Case Code (Metric)=2012, Manufacturer="Vishay Beyschlag", Max Operating Temperature=155°C, Max Power Dissipation=200mW, Min Operating Temperature=-55°C, Resistance=10kR, Resistor Type="Thin Film", Supplier Part Number 1=594-MCU0805MD1002BP1, Temperature Coefficient=25ppm/°C, Tolerance=0.1%, Voltage Rating=150V, Case Code (Imperial)=0805, Category=Resistors, ComponentLink2Description=datasheet, ComponentLink2URL=http://www.vishay.com/docs/28785/mcat_pre.pdf?src-supplier=Digi-Key, ComponentLink3Description=digikey, ComponentLink3URL=https://www.digikey.com/en/products/detail/vishay-beyschlag-draloric-bc-components/MCU0805MD1002BP100/3882985?s=N4IgTCBcDaILIGECqAGAHCgrHAIgRhRTACEAFAlEAXQF8g, Features="Automotive AEC-Q200,Anti-Sulfur", Height=0.52mm, Length=2mm, Manufacturer Part Number=MCU0805MD1002BP100, Number of Terminations=2, Packaging="Tape and Reel", Power Rating=200mW, Pricing 1="1 = 0.75000, 10 = 0.62200, 50 = 0.62200, 100 = 0.41700, 1000 = 0.24400, 10000 = 0.23600 (USD)", RoHS=Yes, RoHS Compliant=Yes, Series="MCU AT - Precision", Stock 1=1150, Supplier 1=Mouser, Weight=0.000162oz, Width=1.25mm
R3 R4 R7: library part RG2012L-472-L-T05, "TR / Thin Film Chip Resistors 0805 0.1W 4.7Kohm 0.01% 2ppm", Case/Package=0805, Case Code (Metric)=2012, Manufacturer=Susumu, Max Operating Temperature=155°C, Max Power Dissipation=100mW, Min Operating Temperature=-55°C, Package Quantity=500, Power Rating=125mW, Resistance=4.7kR, Resistor Type="Thin Film", Supplier Part Number 1=754-RG2012L-472-LT05, Temperature Coefficient=2ppm/°C, Tolerance=0.01%, Voltage Rating=150V, Case Code (Imperial)=0805, Category=Resistors, ComponentLink3Description=datasheet, ComponentLink3URL=https://datasheet.ciiva.com/14981/footprint-8-9-14981898.pdf?src-supplier=Digi-Key, ComponentLink4Description=digikey, ComponentLink4URL=https://www.digikey.com/en/products/category/resistors/2?s=N4IgTCBcDaIEoHEwAYCMYAyBaALAdjC2wBVkBWEAXQF8g, Features="Automotive AEC-Q200", Height=0.02inch, Lead Free="Lead Free", Length=0.079inch, Manufacturer Part Number=RG2012L-472-L-T05, Number of Terminations=2, Packaging="Tape and Reel", Pricing 1="1 = 4.37000, 10 = 3.89000, 50 = 3.89000, 100 = 2.88000, 1000 = 1.83000, 10000 = 1.83000 (USD)", RoHS=Yes, RoHS Compliant=Yes, Series=RG, Stock 1=328, Supplier 1=Mouser, Termination=SMD/SMT, Voltage Rating (DC)=150V, Weight=0.000194oz, Width=1.2mm
R8 R9 R10 R11: library part ERJ-6ENF3900V, "RES SMD 390 OHM 1% 1/8W 0805", Device Package="0805 (2012 Metric)", Manufacturer="Panasonic Electronic Components", Operating Temperature="-55°C ~ 155°C", Power (Watts)="0.125W, 1/8W", Ratings=AEC-Q200, Supplier Device Package=0805, Supplier Part Number 1=P390CCT-ND, Temperature Coefficient=±100ppm/°C, Tolerance=±1%, ComponentLink1Description=Datasheet, ComponentLink1URL=https://industrial.panasonic.com/cdbs/www-data/pdf/RDA0000/AOA0000C304.pdf, ComponentLink2Description="DigiKey Link", ComponentLink2URL=http://digikey.com/product-detail/en/panasonic-electronic-components/ERJ-6ENF3900V/P390CCT-ND/1746861, Composition="Thick Film", Features="Automotive AEC-Q200", Height - Seated (Max)="0.028\" (0.70mm)", LastUpdated="21.01.2020 1:49:03", Lifecycle Status=Active, Minimum Order=1, Number of Terminations=2, Package / Case="0805 (2012 Metric)", Packaging=TapeAndReel, PartId=30170, Part Number=ERJ-6ENF3900V, Part Status=Active, Price=0.01, Resistance="390 Ohms", Series=ERJ, Size / Dimension="0.079\" L x 0.049\" W (2.00mm x 1.25mm)", Supplier 1=DigiKey
RS: library part RG2012L-102-L-T05, "RES SMD 1K OHM 0.01% 1/10W 0805", Case/Package=0805, Case Code (Metric)=2012, Manufacturer=Susumu, Max Operating Temperature=125°C, Min Operating Temperature=-55°C, Package Quantity=500, Power Rating=125mW, Resistance=1kR, Resistor Type="Thin Film", Supplier Part Number 1=754-RG2012L-102-LT05, Temperature Coefficient=2ppm/°C, Tolerance=0.01%, Voltage Rating=150V, Case Code (Imperial)=0805, Category=Resistor, ComponentLink4Description=datasheet, ComponentLink4URL=http://www.susumu-usa.com/pdf/RG_Data_Sheet.pdf?src-supplier=Future+Electronics, ComponentLink5Description=digikey, ComponentLink5URL=https://www.digikey.com/en/products/category/resistors/2?s=N4IgTCBcDaIEoHEwAYCMYAyBaVyxewBVkBWEAXQF8g, Height=0.4mm, Lead Free="Lead Free", Length=2mm, Manufacturer Part Number=RG2012L-102-L-T05, Packaging="Tape and Reel", Pricing 1="1 = 4.99000, 10 = 4.29000, 50 = 4.23000, 100 = 3.29000, 1000 = 1.83000, 10000 = 1.83000 (USD)", RoHS=Yes, Stock 1=5837, Supplier 1=Mouser, Termination=SMD/SMT, Voltage Rating (DC)=150V, Weight=0.000194oz, Width=1.2mm
S1: "Switch DIP ON OFF SPST 3 Flush Slide 0.1A 20VDC Gull Wing 2.54mm SMD T/R", Current Rating=100mA, Manufacturer=CTS, Max Operating Temperature=85°C, Max Voltage Rating (DC)=20V, Min Operating Temperature=-55°C, Package Quantity=1000, Supplier Part Number 1=1774217, Actuator Type="Slide (Standard)", Category="DIP Switches", ComponentLink3Description=datasheet, ComponentLink3URL=https://datasheet.ciiva.com/16316/219-16316222.pdf?src-supplier=Future+Electronics, ComponentLink4Description=digikey, ComponentLink4URL=https://www.digikey.com/en/products/detail/cts-electrocomponents/219-3LPSTR/2734694, Contact Material=Copper, Contact Plating=Gold, Depth=9.91mm, Electrical Life=2000Cycles, Lead Free="Lead Free", Length=0.358inch, Manufacturer Part Number=219-3LPSTR, Max Current Rating=100mA, Mount="Surface Mount", Number of Positions=3, Orientation=Straight, Packaging="Tape and Reel", Pitch=0.1inch, Pricing 1="1 = 56111.10000 (RUB)", Radiation Hardening=No, RoHS=Yes, RoHS Compliant=Yes, Series=219, Stock 1=690, Supplier 1=RSComponents, Termination="Gull Wing", Throw Configuration=SPST, Voltage Rating (DC)=20V, Washable=Yes
stm: "STMICROELECTRONICS - STM32F405RGT7 - ARM MCU, Advanced Connectivity and Encryption, STM32 Family STM32F4 Series Microcontrollers", Case/Package=LQFP, Frequency=168MHz, Manufacturer=STMicroelectronics, Max Operating Temperature=105°C, Max Power Dissipation=435mW, Max Supply Voltage=3.6V, Min Operating Temperature=-40°C, Min Supply Voltage=1.8V, Package Quantity=960, Supplier Part Number 1=99W9902, Category="integrated ICs", ComponentLink1Description=datasheet, ComponentLink1URL=https://datasheet.ciiva.com/48492/dm00037051-48492456.pdf?src-supplier=Avnet, ComponentLink2Description=digikey, ComponentLink2URL=https://www.digikey.com/en/products/category/integrated-circuits-ics/32?s=N4IgTCBcDaIMoBUCyBmMAxALABgKwCUBxBAdhAF0BfIA, Core Architecture=ARM, Data Bus Width=32b, Interface=I2C,SPI,USB,CAN,IrDA,UART,USART,LIN,I2S,SDIO, Lead Free="Lead Free", Manufacturer Part Number=STM32F405RGT7, Max Frequency=168MHz, Memory Size=1MB, Memory Type=FLASH, Number of ADC Channels=16, Number of I/Os=51, Number of Pins=64, Number of Programmable I/O=51, Number of Timers/Counters=14, Oscillator Type=Internal, Packaging=Tray, Peripherals="Brown-out Detect/Reset,POR,PWM,WDT,DMA,LCD", Pricing 1="1 = 15.56000, 10 = 14.52000, 25 = 14.04000, 50 = 13.36000, 100 = 12.67000, 250 = 12.19000, 500 = 11.57000 (USD)", Radiation Hardening=No, RAM Size=192KB, REACH SVHC="No SVHC", RoHS=Yes, RoHS Compliant=Yes, Stock 1=14, Supplier 1=Avnet, Watchdog Timer=Yes
sw1: "E-SWITCH - TL3305AF160QG - TACTILE SW, SPST, 0.05A, 12VDC, SOLDER", Manufacturer=E-Switch, Max Operating Temperature=70°C, Min Operating Temperature=-20°C, Operating Force=160gf, Supplier Part Number 1=2830823, Actuator Type=Standard, Category=Switches, ComponentLink3Description=datasheet, ComponentLink3URL=http://spec_sheets.e-switch.com/specs/P010468.pdf?src-supplier=Digi-Key, ComponentLink4Description=digikey, ComponentLink4URL=https://www.digikey.com/en/products/detail/e-switch/TL3305AF160QG/5816181?s=N4IgTCBcDaICoBkDMSAMBWAggMQIwDZUBFAcRAF0BfIA, Illumination Type=Non-Illuminated, Lead Free="Lead Free", Manufacturer Part Number=TL3305AF160QG, Mechanical Life=500000Cycles, Mount="Surface Mount", Packaging="Tape and Reel", Pricing 1="1 = 1.03000, 10 = 1.01000, 25 = 0.95000, 50 = 0.91000, 100 = 0.86000, 250 = 0.81000, 500 = 0.74000, 1000 = 0.62000 (EUR)", RoHS=Yes, Stock 1=10782, Supplier 1=Farnell, Switch Function=Off-Mom, Switch Travel=0.2mm, Termination="Gull Wing", Throw Configuration=SPST
sw2: "JST (JAPAN SOLDERLESS TERMINALS) - SM04B-SRSS-TB(LF)(SN) - Wire-To-Board Connector, 1 mm, 4 Contacts, Header, SH Series, Surface Mount, 1 Rows", Color=Natural, Contact Resistance=40mR, Housing Color=Beige, Manufacturer=JST, Max Current Rating=1A, Max Operating Temperature=85°C, Max Voltage Rating (AC)=50V, Min Operating Temperature=-25°C, Supplier Part Number 1=1830839, Category=connector, ComponentLink3Description=datasheet, ComponentLink3URL=https://datasheet.ciiva.com/16487/jstsm04b-srss-tb-lf-sn-16487222.pdf?src-supplier=Future+Electronics, ComponentLink4Description=digikey, ComponentLink4URL=https://www.digikey.com/en/products/detail/jst-sales-america-inc/SM04B-SRSS-TB-LF-SN/926710?s=N4IgTCBcDaIDoBcAEBlAsgBgCwCEC0KASiingCo4AUAMgGICUlKAcvSALoC%2BQA, Connector Type="Male Pin", Contact Material="Copper Alloy", Contact Plating=Tin,Copper, Depth=4.95mm, Housing Material=Polyamide, Lead Free="Lead Free", Length=6mm, Manufacturer Part Number=SM04B-SRSS-TB(LF)(SN), Max Voltage Rating (DC)=50V, Mount="Surface Mount", Number of Contacts=4, Number of Positions=4, Number of Rows=1, Orientation="Right Angle", Packaging="Tape and Reel", Pitch=0.039inch, Pricing 1="10 = 2.18000, 100 = 1.67000, 500 = 1.45000, 1000 = 1.20000, 2500 = 1.14000, 5000 = 1.09000 (EUR)", RoHS=Yes, Stock 1=7459, Supplier 1=Farnell, Termination=Solder
VR1 VR2 VR3 VR4: library part TC33X-2-103E, "Res Trimmer 10K Ohm 25% 1/10W 1(Elec)/1(Mech)Turn (3 X 3.8mm) Foot Print SMD Embossed T/R", Color=Silver, Manufacturer=Bourns, Max Operating Temperature=100°C, Max Power Dissipation=100mW, Min Operating Temperature=-40°C, Package Quantity=2500, Resistance=10kR, Resistance Tolerance=25%, Resistor Type=Cermet, Supplier Part Number 1=1689863, Temperature Coefficient=250ppm/°C, Voltage Rating (DC)=50V, ComponentLink9Description=datasheet, ComponentLink9URL=https://datasheet.ciiva.com/16802/tc33-16802397.pdf?src-supplier=Avnet+Europe, ComponentLink10Description=digikey, ComponentLink10URL=https://www.digikey.com/en/products/detail/bourns-inc/TC33X-2-103E/612858?s=N4IgTCBcDaICoGEDMSAaBaM6CMAGJAoiALoC%2BQA, Contact Plating=Copper,Tin,Silver, Depth=3.8mm, Height=0.047inch, Lead Free="Lead Free", Length=3mm, Manufacturer Part Number=TC33X-2-103E, Military Standard=Not, Mount="Surface Mount", Number of Turns=1, Packaging="Tape and Reel", Power Rating=100mW, Pricing 1="5 = 1.24000, 50 = 0.99000, 250 = 0.83000, 500 = 0.75000, 1000 = 0.68000 (EUR)", Radiation Hardening=No, REACH SVHC="No SVHC", RoHS=Yes, RoHS Compliant=Yes, Series=TC33, Stock 1=1905, Supplier 1=Farnell, Taper=Linear, Termination="Foot Print", Tolerance=25%, Weight=29.4mg, Width=0.118inch

## Via types
v1: diameter 0.25, hole 0.18, Top Layer to Bottom Layer, 41 vias
v2: diameter 0.3, hole 0.2, Top Layer to Bottom Layer, 4 vias

## Nets (pads, with @x,y where several pads share a name; then routed paths per layer and width w, separated by ;. In a path a pad name is that pad's centre, name@x,y a point inside that pad or via, vN(x,y) a via of type N, cw(c..) or ccw(c..) an arc to the next point about the centre after c; other vN are vias at no path point)
3.3V: C12.2 C13.2 C14.2 C15.2 cap4.2 cap5.2 H1.1 IC1.5 L1.1 R1.1 R3.2 R4.2 R6.1 R8.1 R9.1 R10.1 R11.1 stm.19 stm.32 stm.48 stm.64 U1.C U2.C U3.C U4.C | length 162
  Top Layer w0.25: v1(-16.8,1.25) -15.693,1.25 v1(-15.175,0.732) ; R9.1@-10.902,0.033 -10.902,1.067 -10.751,1.217 -10,1.968 -8.632,1.968 -8.1,2.5 -8.1,2.3 -7.075,1.275 -4.974,1.275 -4.842,1.407 -4.842,1.44 -1.782,4.5 -1.3,4.5 v1(0,5.8) 2.3,8.1 U4.C ; v1(-8.175,15.1) -7.975,14.9 v1(-5.95,14.9) ; U3.C -2.5,-10.237 -1.932,-10.805 R10.1 0.968,-11.043 0.975,-11.05 0.975,-11.187 2.163,-12.375 2.838,-12.375 8.25,-6.963 8.25,-2.65 U1.C 9.5,-2.5 ; R11.1 -1.567,10.523 0.181,8.775 1.825,8.775 U4.C ; v1@0.542,12.583 1.6,13.64 ; v1@11.409,11.313 11.409,10.566 cap4.2@13.586,8.389 ; H1.1@16.575,-0.823 16.575,0.174 14.176,2.573 12.327,2.573 ; IC1.5 17.381,-6.425 13.456,-2.5 9.5,-2.5 ; 1.6,13.64 2.5,12.74 U4.C ; 1.6,13.64 cap5.2 1.675,14.975 C15.2 C14.2 9.701,14.975 C13.2 10.837,13.951 13.475,11.313 C12.2 cap4.2@13.586,8.389 ; 9.5,-2.5 11.03,-0.97 R8.1 11.405,0.968 11.58,1.143 11.58,1.825 12.327,2.573 ; 12.327,2.573 13.65,3.895 cap4.2 13.586,8.039 cap4.2@13.586,8.389
  Bottom Layer w0.25: R1.1 -17.212,6.487 -17.212,4.088 R6.1 -17.2,2.856 -16.85,2.506 -16.85,-1.292 -17.625,-2.067 -17.625,-8.125 -14.4,-11.35 ; v1(-15.175,0.732) -11.833,0.732 -11.365,1.2 v1(-10.734,1.2) -7.809,4.125 -6.65,4.125 -6.625,4.15 stm.32 ; R4.2 -12.8,-8.125 -13.025,-8.35 -13.575,-8.35 -14.4,-9.175 -14.4,-11.35 ; R3.2 -11.9,-14.25 -13.85,-14.25 -14.4,-13.7 -14.4,-11.35 ; stm.48 -8.175,14.1 -8.15,14.125 v1@-8.15,15.1 ; v1@-5.925,14.9 -1.9,14.9 -1.1,14.1 0.55,14.1 ; stm.19 -0.125,5.675 v1(0,5.8) ; v1(0.55,12.575) 0.55,14.1 ; stm.64 0.85,16.075 0.85,15.225 0.55,14.925 0.55,14.1 ; v1@11.409,11.313 11.52,11.425 L1.1 L1.1@12.5,11.425
  other v1: 11.384,11.313
5V: AD.1 AD.15 AD.20 C8.2 C17.2 C18.1 C19.1 IC1.1 MC*.3 R7.1 sw2.1 | length 84.5
  Top Layer w0.25: AD.1 -15.875,-8.1 -16.729,-8.1 -16.875,-7.954 AD.20 -16.221,-7.425 -15.733,-6.936 -15.733,-5.133 -15.875,-4.99 -15.875,-2.55 v1(-15.5,-2.175) ; v2@3.025,-13.85 3.375,-13.85 5.225,-12 C19.1 5.625,-12 5.775,-11.85 5.775,-11.725 7.575,-9.925 C18.1 9.125,-9.925 9.975,-9.075 12.125,-9.075 ; C18.1@7.775,-9.9 C18.1@7.875,-9.9 ; R7.1 12.125,-9.075 ; v1(14.875,-4.925) 15.1,-5.15 IC1.1 13.25,-6.425 12.15,-5.325 C17.2 11.85,-5.325 11.15,-6.025 11.15,-7.35 12.125,-8.325 12.125,-9.075
  Bottom Layer w0.25: v1(-15.5,-2.175) -13.375,-2.175 -13.1,-1.9 -2.75,-1.9 -1.825,-2.825 -1.825,-12.425 -0.425,-13.825 v2(3.025,-13.825) ; MC*.3@5.55,-5.3 6.65,-5.3 7.525,-4.425 7.525,-3.154 9.675,-1.004 9.675,0.925 10.275,1.525 14.3,1.525 14.844,0.981 C8.2 14.844,-0.9 14.092,-1.652 14.092,-2.55 14.725,-2.55 15.1,-2.925 15.1,-4.7 v1(14.875,-4.925) ; sw2.1@13.35,-4.5 13.425,-4.425 15.05,-4.425
Boot0: R5.1 S1.3 stm.60 | length 63.1
  Bottom Layer w0.2: stm.60 -1.175,16.15 -1.175,16.825 -1.925,17.575 -7.675,17.575 -16.425,8.825 -16.425,-2.025 -17.25,-2.85 -17.25,-4.183 -17.133,-4.3 -11.825,-4.3 -9.05,-7.075 -9.05,-10.425 -8.35,-11.125 -5.012,-11.125 -1.547,-14.59 0.68,-14.59 1.175,-15.085 1.175,-15.175 1.295,-15.055 1.8,-15.055 2.265,-15.52 3.745,-15.52 4.975,-16.75 R5.1
CAN1_RX: MC*.4 stm.44 | length 25.9
  Top Layer w0.2: v1@3.251,2.55 3.551,2.25 v1(4.6,2.25)
  Bottom Layer w0.2: stm.44 -5.474,12.1 3.4,3.226 3.4,2.7 v1(3.25,2.55) ; v1(4.6,2.25) 6.8,0.05 6.8,-2.89 5.705,-3.985 MC*.4
CAN1_TX: MC*.1 stm.45 | length 28.8
  Bottom Layer w0.2: stm.45 -5.55,12.6 3.975,3.075 3.975,2.675 2.925,1.625 2.925,-1.975 4.368,-3.418 4.368,-7.193 MC*.1@5.025,-7.85
CANH: MC*.7 R1N.2 sw2.3 | length 9
  Bottom Layer w0.2: MC*.7 sw2.3 ; sw2.3@13.175,-6.575 13.85,-6.575 15.25,-7.975 15.25,-9.775 14.975,-10.05 14.975,-10.436 14.3,-11.111 R1N.2
CANL: MC*.6 R1N.1 sw2.4 | length 9.5
  Bottom Layer w0.2: MC*.6 10.03,-5.255 9.325,-5.96 9.325,-6.65 9.868,-7.193 11.409,-7.193 11.716,-7.5 12.3,-7.5 12.5,-7.7 12.5,-11.336 R1N.1
GND: AD.4 AD.5 AD.10 C1.1 C2.2 C4.1 C5.1 C7.1 C8.1 C12.1 C13.1 C14.1 C15.1 C17.1 C18.2 C19.2 C21.1 C.2 cap1.2 cap2.1 cap3.2 cap4.1 cap5.1 cap6.1 H1.4 IC1.2 LED2.2 MC*.2 R2.1 R5.2 RS.2 stm.12 stm.18 stm.63 sw1.1 sw2.2 U1.K U2.K U3.K U4.K VR1.1 VR2.3 VR3.3 VR4.1 | length 233.1
  Top Layer w0.25: cap6.1 -13.125,-13.038 -13.125,-11.971 -13.75,-11.346 C21.1 -13.75,-9.875 -14.375,-9.25 AD.4 AD.5 -13.875,-6.05 -13.25,-5.425 AD.10 -12.5,-5.425 -11.775,-4.7 -11.575,-4.7 ; v1(-11.575,-3.35) -11.575,-4.7 ; v1(-7.375,0.2) -6.575,-0.6 -6.575,-1.825 -5.9,-2.5 -5.9,-2.7 -7,-3.8 ; VR4.1 -7,-6.75 -7,-4.7 ; VR2.3 v1(-5.75,9.675) -5.75,11.675 -1.2,16.225 1.55,16.225 cap5.1 3.35,16.175 ; v1@-3.775,9.425 -3.775,6.975 -2.7,5.9 U4.K ; v1(0.35,3.175) 3.725,3.175 4.875,4.325 v2@5.715,4.325 ; v1(3.375,17.8) 3.35,17.775 3.35,16.175 ; VR3.3 v2@5.715,4.325 ; v1(6.05,-15.45) 6.596,-14.904 6.596,-14.475 ; VR1.1 5.794,-5.9 v1(4.9,-5.9) 3.9,-5.9 U3.K@2.7,-5.9 ; v1(6.9,9.9) 9,9.9 11.01,7.89 v1@11.01,4.325 ; C18.2 7.575,-11.125 v2(6.8,-11.9) 6.325,-12.375 6.325,-12.5 5.625,-13.2 6.45,-14.025 6.45,-14.329 6.596,-14.475 ; C17.1 12.15,-6.425 C17.1@12.325,-6.6 ; cap4.1 cap4.1@14.88,8.08 ; IC1.2 13.19,-7.465 C17.1@12.325,-6.6 ; H1.4@16.575,6.925 16.555,6.945 16.555,7.875 16.35,8.08 14.975,8.08 cap4.1@14.88,8.08 ; -11.575,-4.7 -7,-4.7 ; -7,-4.7 -7,-3.8 ; -7,-3.8 -5.95,-4.85 -0.975,-4.85 0.075,-5.9 U3.K U3.K@2.7,-5.9 ; U3.K@2.7,-5.9 4.3,-4.3 4.3,1.375 5.425,2.5 U1.K 5.715,2.685 v2@5.715,4.325 ; 3.35,16.175 C15.1 C14.1 10.199,16.175 C13.1 11.615,14.799 14.323,12.091 C12.1 14.364,11.996 14.9,11.46 14.9,10.75 14.975,10.675 14.975,8.175 cap4.1@14.88,8.08 ; 6.596,-14.475 11.825,-14.475 12.85,-13.45 12.85,-8.555 12.325,-8.03 C17.1@12.325,-6.6
  Bottom Layer w0.25: -16.475,-2.825 -16.475,-2.535 -15.988,-2.047 -15.988,0.687 -14.038,2.637 -13.288,2.637 LED2.2 -13,4.825 -13,8.271 cap3.2 ; -16.45,-2.825 -15.925,-3.35 v1(-11.575,-3.35) -11.025,-3.35 -10.375,-4 C4.1 ; cap2.1 -8.012,1.3 -7.35,0.638 v1@-7.35,0.2 ; v1(-5.75,9.675) -4.05,9.675 v1(-3.8,9.425) ; v1@0.375,3.175 0.375,3.226 stm.18 ; stm.63 0.4,16.125 0.4,16.813 0.925,17.338 2.669,17.338 3.156,17.825 5.025,17.825 5.775,17.075 C.2 6.225,16.975 C2.2 ; stm.12 2.9,8.625 3.8,8.625 4.75,9.575 4.75,9.875 C7.1 6.9,9.875 v1@6.925,9.9 ; v2(3.9,-5.925) 3.9,-9 v2(6.8,-11.9) 7.425,-11.9 7.525,-12 8.2,-12 ; v1(4.4,1.425) 4.4,1.189 4.6,0.989 C5.1 C5.1@4.6,0.15 ; v1(4.9,-5.9) 4.95,-5.95 4.95,-6.395 5.08,-6.525 MC*.2 ; R2.1 5.225,-14.35 5.55,-14.675 5.55,-14.925 6.45,-15.825 6.45,-16.675 R5.2 ; C1.1 5.7,5.85 v2(5.7,4.325) v1(11.075,4.325) 11.9,4.325 ; RS.2 8.908,-13.575 8.2,-12.867 8.2,-12 ; sw1.1 11.875,6.575 11.875,4.35 11.9,4.325 ; sw2.2 12.187,-5.525 11.25,-4.588 11.25,-2.825 ; C8.1@13.775,-0.244 12.125,-1.894 12.125,-2.825 11.25,-2.825 ; cap1.2@15.488,11.375 15.238,11.625 15.238,11.975 15.212,12 15.212,11.625 15.212,8.338 H1.4 ; H1.4@16.35,6.975 13.7,4.325 11.9,4.325 ; 8.2,-12 8.2,-6.8 7.63,-6.23 9.4,-4.46 9.4,-3.1 9.675,-2.825 11.25,-2.825
MISO: AD.14 stm.22 | length 20.7
  Top Layer w0.2: AD.14 -15.375,-2.923 -14.675,-2.223 -14.675,-1.325 v1(-15.125,-0.875)
  Bottom Layer w0.2: v1(-15.125,-0.875) -5.575,-0.875 -1.625,3.075 stm.22
MOSI: AD.12 stm.23 | length 21.8
  Top Layer w0.2: AD.12 -14.375,-2.772 -13.6,-1.997 v1(-13.6,1.45)
  Bottom Layer w0.2: v1(-13.6,1.45) -11.575,1.45 -6.275,6.75 -2.425,6.75 -2.125,6.45 stm.23
NetAD_2: AD.2 C21.2 | length 2.9
  Top Layer w0.2: AD.2 -15.375,-10.562 -14.95,-10.987 C21.2@-14.95,-11.187
NetAD_3: AD.3 cap6.2 | length 5
  Top Layer w0.2: AD.3 -14.875,-9.525 -14.375,-10.025 -14.375,-10.737 -14.25,-10.862 -14.25,-13.038 cap6.2
NetAD_7: AD.7 VR4.2 | length 4
  Top Layer w0.2: AD.7 -9.075,-6.925 VR4.2 VR4.2@-9,-7.05
NetAD_9: AD.9 VR1.2 | length 31.6
  Top Layer w0.2: AD.9 -12.5,-5.925 -12.075,-5.5 -7.775,-5.5 -7.525,-5.75 -7.525,-11.475 -6.1,-12.9 3.094,-12.9 9.444,-6.55 VR1.2
NetAD_16: AD.16 VR2.2 | length 19.8
  Top Layer w0.2: AD.16@-17.1,-5.425 AD.16 -16.875,-0.95 -15.85,0.075 -14.65,0.075 -14.4,0.325 -14.4,5.465 -14.842,5.908 -14.842,6.233 -14.575,6.5 VR2.2 VR2.2@-9,6.45
NetAD_18: AD.18 VR3.2 | length 35.8
  Top Layer w0.2: AD.18@-17.25,-6.425 AD.18 -16.175,-6.425 -16.058,-6.308 -16.058,-5.267 -16.3,-5.025 -16.3,-1.275 -15.775,-0.75 -15.75,-0.75 v1(-15.325,-0.325) ; v1(-8.25,0.25) -7.785,0.25 -7.51,0.525 -5.264,0.525 -1.614,4.175 3.575,4.175 4.325,4.925 4.325,6.225 5.1,7 VR3.2
  Bottom Layer w0.2: v1(-15.325,-0.325) -12.082,-0.325 -11.507,0.25 v1(-8.25,0.25)
NetC2_1: C2.1 CR1.1 stm.3 | length 7.9
  Bottom Layer w0.2: stm.3 5.65,13.1 CR1.1@5.675,13.075 ; CR1.1 7.896,13.071 8.925,14.1 C2.1
NetC4_2: C4.2 CR2.2 stm.5 | length 33.6
  Top Layer w0.2: v1@-3.925,3.15 -4.275,3.5 -4.275,12.2 -3.675,12.8 -1.325,12.8 -0.183,11.658 v1(0.5,11.658) ; -3.525,-3.475 -3.525,-2.719 -2.75,-1.944 -2.75,-1.142 -3.2,-0.692 v1@-3.2,2.05
  Bottom Layer w0.2: C4.2 -8.375,-2.5 -6.025,-4.85 CR2.2@-4,-4.85 ; CR2.2@-4.825,-5.174 CR2.2@-4.5,-5.174 ; CR2.2@-3.925,-4.974 -3.425,-4.474 v1@-3.425,-3.599 ; v1(-3.925,3.175) -3.925,2.75 v1(-3.225,2.05) ; v1(0.5,11.658) 1.083,11.658 1.525,12.1 stm.5
  other v1: -3.45,-3.599
NetC5_2: C5.2 CR2.1 stm.6 | length 30.7
  Top Layer w0.2: v1(2.557,-2.449) 3.425,-1.581 v1(3.425,-0.55) ; v1(5.2,11.633) 6.005,10.828 6.005,10.02 7.55,8.475 9.5,8.475 10.25,7.725 10.25,4.6 9.35,3.7 7.217,3.7 7.075,3.558 7.075,3.55 6.95,3.425 6.95,-0.375 v1@6.35,-0.975
  Bottom Layer w0.2: CR2.1@0.7,-4.974 1.85,-4.974 2.35,-4.474 2.35,-2.681 v1@2.582,-2.449 ; stm.6 5.192,11.6 v1@5.225,11.633 ; v1@3.45,-0.55 4.25,-1.35 5.95,-1.35 v1(6.325,-0.975)
NetC7_2: C7.2 cap1.1 L1.2 stm.13 | length 19.5